# EAGLE board mg (EAGLE 6.3)
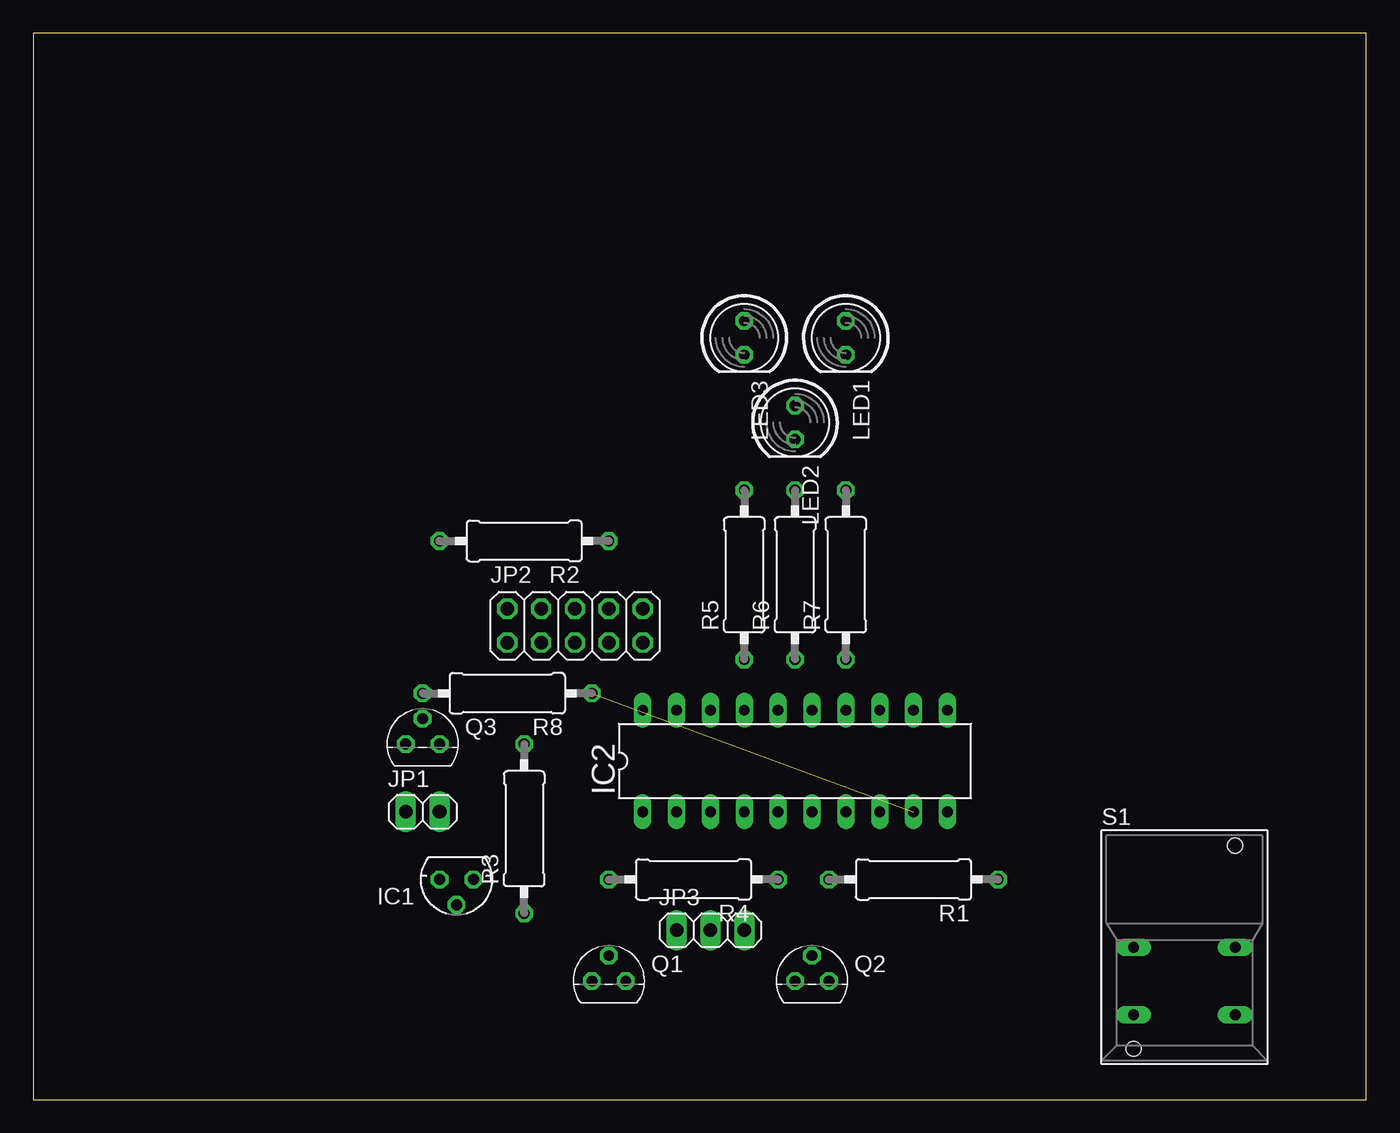
[diagram p0: board, top side]
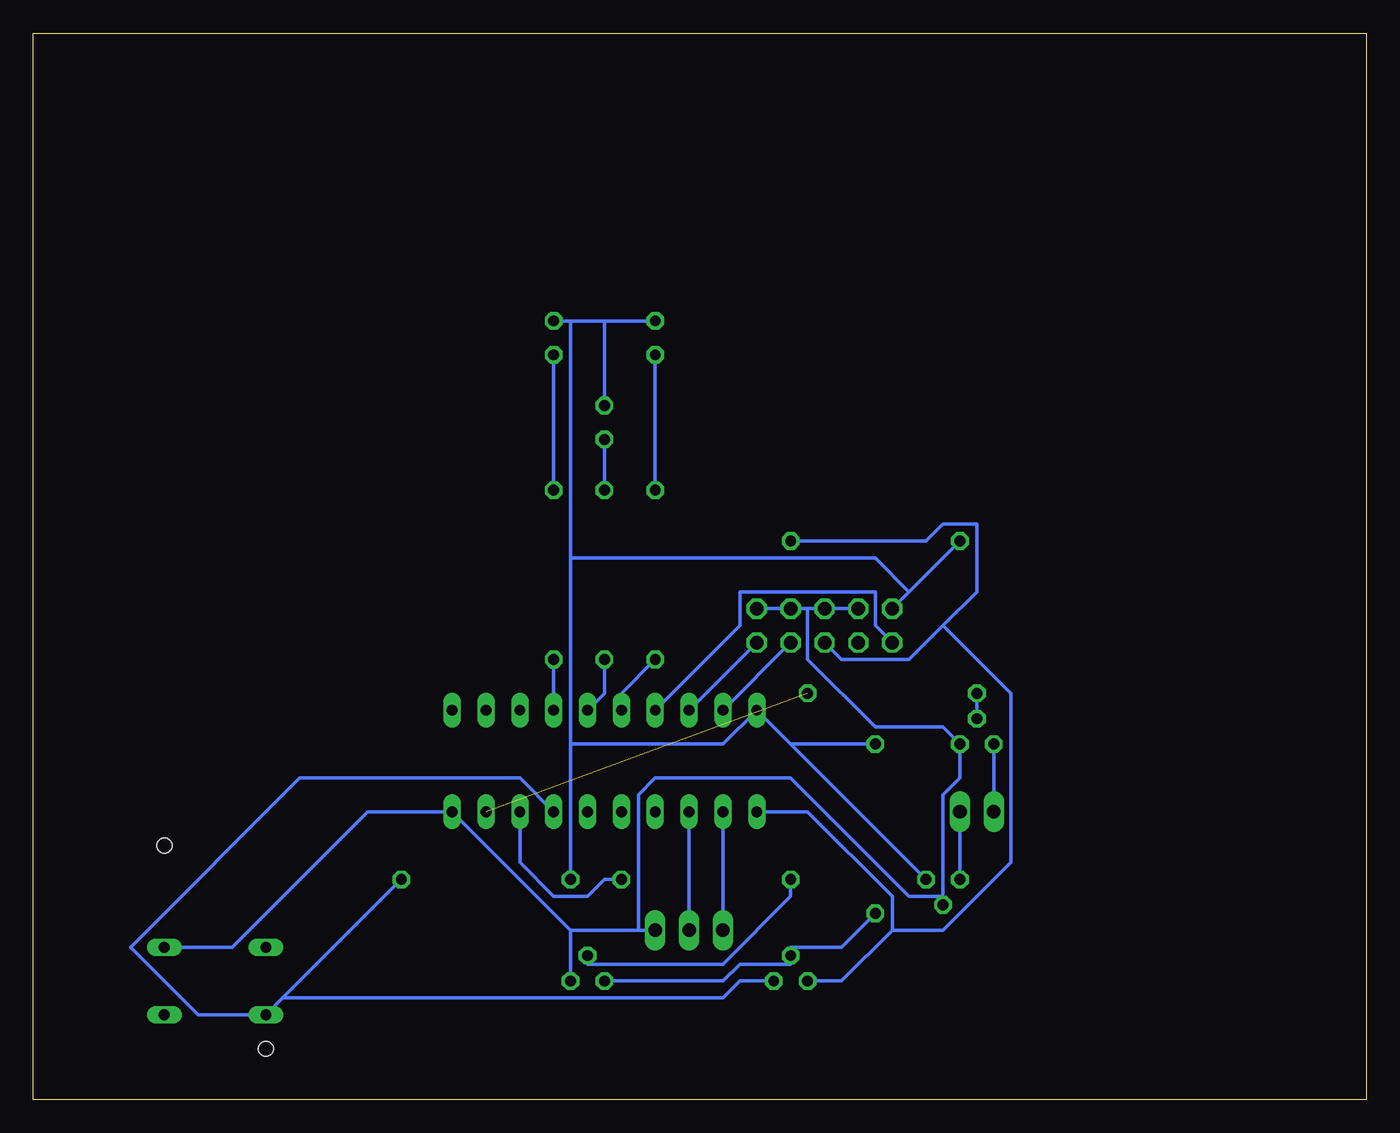
[diagram p1: board, bottom side, seen from below]

Size 100 x 80 mm. Coordinates in mm from the lower left corner, seen from the top.
Outline: 0,0 100,0 100,80 0,80 0,0
Copper layers (1*16): Top 0.035mm / dielectric 1.5mm / Bottom 0.035mm
Design rules "default": minimum track width 10mil, minimum drill 24mil, track to track 8mil, track to pad 8mil, pad to pad 8mil, via to via 8mil, smd to smd 8mil, copper to edge 40mil, drill to drill 8mil, minimum pad ring 10mil, minimum via ring 8mil, stop-mask expansion 4mil, vias tented up to drill 0mil, thermal gap 10mil

## Footprints (pad centres in the part's own frame; a part is rotated, then mirrored left to right if it is on the bottom)
78LXX = drill 0.813 octagon: GND 0,1.905; IN 1.27,0; OUT -1.27,0
DIL20 = drill 0.813 long: 1 -11.43,-3.81; 2 -8.89,-3.81; 3 -6.35,-3.81; 4 -3.81,-3.81; 5 -1.27,-3.81; 6 1.27,-3.81; 7 3.81,-3.81; 8 6.35,-3.81; 9 8.89,-3.81; 10 11.43,-3.81; 11 11.43,3.81; 12 8.89,3.81; 13 6.35,3.81; 14 3.81,3.81; 15 1.27,3.81; 16 -1.27,3.81; 17 -3.81,3.81; 18 -6.35,3.81; 19 -8.89,3.81; 20 -11.43,3.81
1X02 = drill 1.016 long: 1 -1.27,0; 2 1.27,0
2X05 = drill 1.016 octagon: 1 -5.08,-1.27; 2 -5.08,1.27; 3 -2.54,-1.27; 4 -2.54,1.27; 5 0,-1.27; 6 0,1.27; 7 2.54,-1.27; 8 2.54,1.27; 9 5.08,-1.27; 10 5.08,1.27
1X03 = drill 1.016 long: 1 -2.54,0; 2 0,0; 3 2.54,0
LED5MM = drill 0.813 octagon: A -1.27,0; K 1.27,0
TO92 = drill 0.813 octagon: 1 1.27,0; 2 0,1.905; 3 -1.27,0
0309/12 = drill 0.813 octagon: 1 -6.35,0; 2 6.35,0
SRK = drill 0.813 long: 1 -3.81,-5.08; 2 -3.81,0; 3 3.81,0; 4 3.81,-5.08 | hole 1.118: -3.81,-7.62; 3.81,7.62

## Placement (x,y rotation side)
IC1  78L05  [78LXX]  31.75,16.51 180 top
IC2  AT90S2313P  [DIL20]  57.15,25.4 0 top
JP1  [1X02]  29.21,21.59 0 top
JP2  [2X05]  40.64,35.56 0 top
JP3  [1X03]  50.8,12.7 0 top
LED1  [LED5MM]  60.96,57.15 270 top
LED2  [LED5MM]  57.15,50.8 270 top
LED3  [LED5MM]  53.34,57.15 270 top
Q1  BC238  [TO92]  43.18,8.89 0 top
Q2  BC238  [TO92]  58.42,8.89 0 top
Q3  BC238  [TO92]  29.21,26.67 0 top
R1  10k  [0309/12]  66.04,16.51 180 top
R2  10k  [0309/12]  36.83,41.91 180 top
R3  10k  [0309/12]  36.83,20.32 90 top
R4  10k  [0309/12]  49.53,16.51 180 top
R5  500  [0309/12]  53.34,39.37 90 top
R6  500  [0309/12]  57.15,39.37 90 top
R7  500  [0309/12]  60.96,39.37 90 top
R8  10k  [0309/12]  35.56,30.48 180 top
S1  SRK  [SRK]  86.36,11.43 0 top

## Library data of the parts
IC1 = v-reg
IC2 = atmel; OC_FARNELL: unknown; OC_NEWARK: unknown
JP1-JP3 = pinhead
LED1-LED3 = led
Q1-Q3 = transistor-npn
R1-R8 = resistor
S1 = switch-misc

## Nets
!RESET: IC2.1 JP2.5 Q1.3 R2.1
+5V: IC1.OUT IC2.20 JP2.2 LED1.A LED2.A LED3.A R1.2 R2.2 R3.2
+18V: IC1.IN JP1.2
GND: IC1.GND IC2.10 JP2.4 JP2.6 JP2.8 JP2.10 JP3.3 Q2.1 Q3.1 S1.3
MISO: IC2.18 JP2.9
MOSI: IC2.17 JP2.1
N$2: Q1.2 Q2.3 R3.1
N$4: IC2.7 Q1.1 R1.1 S1.1
N$6: Q2.2 R4.2
N$7: IC2.9 R8.1
N$8: IC2.16 R5.1
N$9: IC2.15 R6.1
N$10: LED3.K R5.2
N$11: IC2.14 R7.1
N$12: Q3.2 R8.2
N$14: JP1.1 Q3.3
N$15: LED2.K R6.2
N$16: LED1.K R7.2
N$17: IC2.8 R4.1
N$20: IC2.3 JP3.2
N$21: IC2.2 JP3.1
SCK: IC2.19 JP2.7

## Tracks (layer width: path | path; a pad name or v marks a point on that pad's centre or on a via)
!RESET
  Bottom 0.254: R2.1 33.02,41.91 31.75,43.18 29.21,43.18 29.21,38.1 31.75,35.56 | 31.75,35.56 34.29,33.02 39.37,33.02 JP2.5 | Q1.3 39.37,8.89 35.56,12.7 | 35.56,12.7 35.56,15.24 41.91,21.59 IC2.1 | 31.75,35.56 26.67,30.48 26.67,17.78 31.75,12.7 35.56,12.7
+5V
  Bottom 0.254: 43.18,26.67 IC2.20 48.26,26.67 59.69,26.67 | 43.18,26.67 IC1.OUT | 43.18,26.67 R3.2 | JP2.2 34.29,38.1 | 34.29,38.1 R2.2 | LED1.A 59.69,58.42 | 59.69,58.42 57.15,58.42 | 57.15,58.42 LED3.A | 57.15,58.42 LED2.A | 59.69,58.42 59.69,40.64 | 59.69,40.64 59.69,26.67 | 59.69,26.67 R1.2 | 34.29,38.1 36.83,40.64 59.69,40.64
+18V
  Bottom 0.254: JP1.2 IC1.IN
GND
  Bottom 0.254: JP2.4 JP2.6 41.91,36.83 | 41.91,36.83 JP2.8 JP2.10 | 31.75,15.24 31.75,22.86 30.48,24.13 Q3.1 31.75,27.94 36.83,27.94 41.91,33.02 41.91,36.83 | 59.69,12.7 Q2.1 | 59.69,12.7 IC2.10 74.93,21.59 85.09,11.43 S1.3 | 59.69,12.7 54.61,12.7 | 54.61,12.7 JP3.3 | 31.75,15.24 34.29,15.24 43.18,24.13 53.34,24.13 54.61,22.86 54.61,12.7 | 31.75,15.24 IC1.GND
MISO
  Bottom 0.254: JP2.9 IC2.18
MOSI
  Bottom 0.254: IC2.17 46.99,35.56 46.99,38.1 36.83,38.1 36.83,35.56 JP2.1
N$2
  Bottom 0.254: R3.1 39.37,11.43 43.18,11.43 Q1.2 43.18,10.16 46.99,10.16 48.26,8.89 Q2.3
N$4
  Bottom 0.254: R1.1 81.28,7.62 | 81.28,7.62 S1.1 87.63,6.35 92.71,11.43 80.01,24.13 63.5,24.13 IC2.7 | Q1.1 46.99,8.89 48.26,7.62 81.28,7.62
N$6
  Bottom 0.254: R4.2 43.18,15.24 48.26,10.16 58.42,10.16 Q2.2
N$7  (1 unrouted)
N$8
  Bottom 0.254: R5.1 55.88,30.48 IC2.16
N$9
  Bottom 0.254: R6.1 57.15,30.48 IC2.15
N$10
  Bottom 0.254: LED3.K R5.2
N$11
  Bottom 0.254: R7.1 IC2.14
N$12
  Bottom 0.254: R8.2 Q3.2
N$14
  Bottom 0.254: JP1.1 Q3.3
N$15
  Bottom 0.254: LED2.K R6.2
N$16
  Bottom 0.254: LED1.K R7.2
N$17
  Bottom 0.254: R4.1 57.15,16.51 58.42,15.24 60.96,15.24 63.5,17.78 IC2.8
N$20
  Bottom 0.254: JP3.2 IC2.3
N$21
  Bottom 0.254: JP3.1 IC2.2
SCK
  Bottom 0.254: JP2.7 IC2.19